# EAGLE board main (EAGLE 7.2.0)
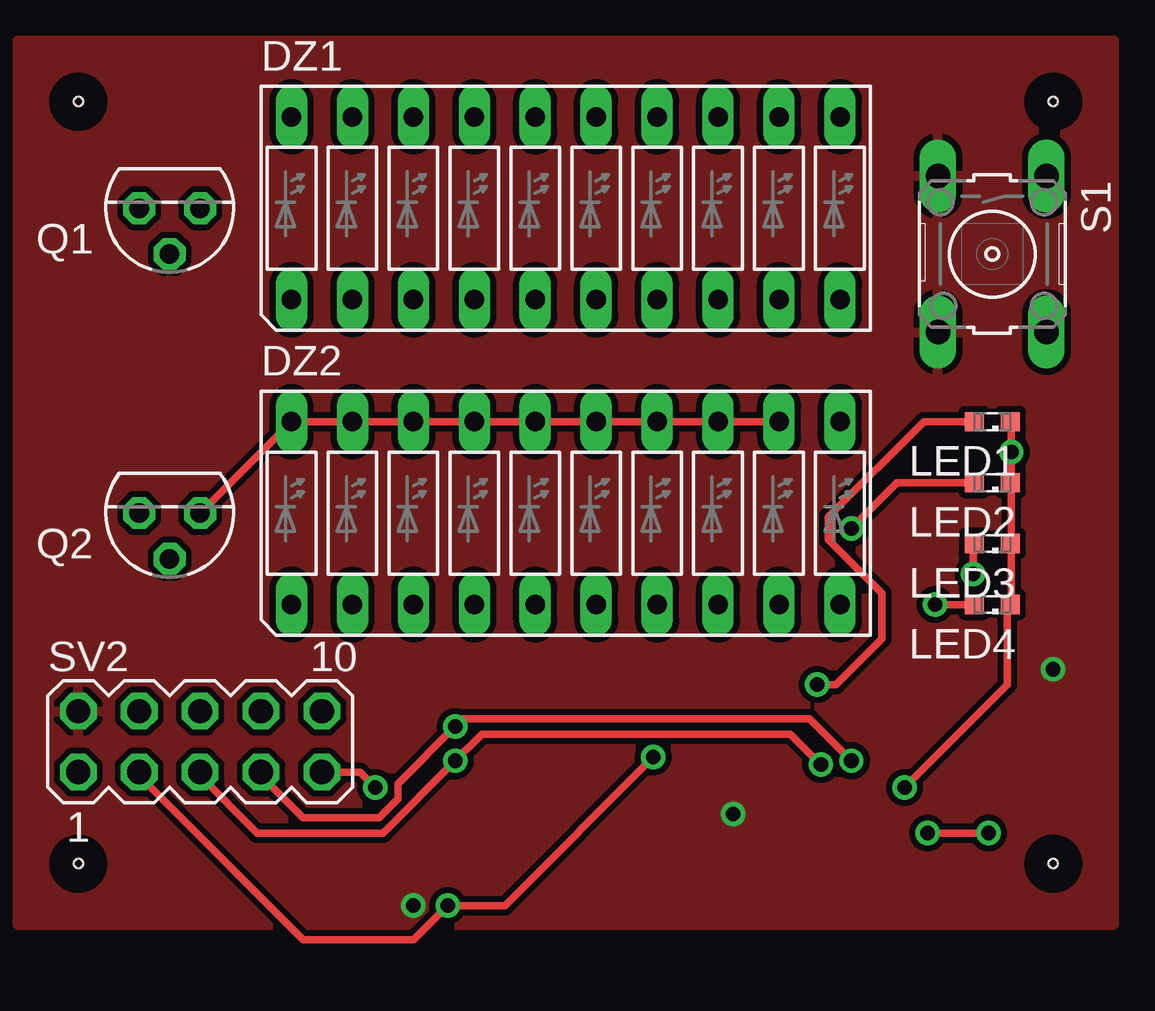
[diagram p0: board, top side]
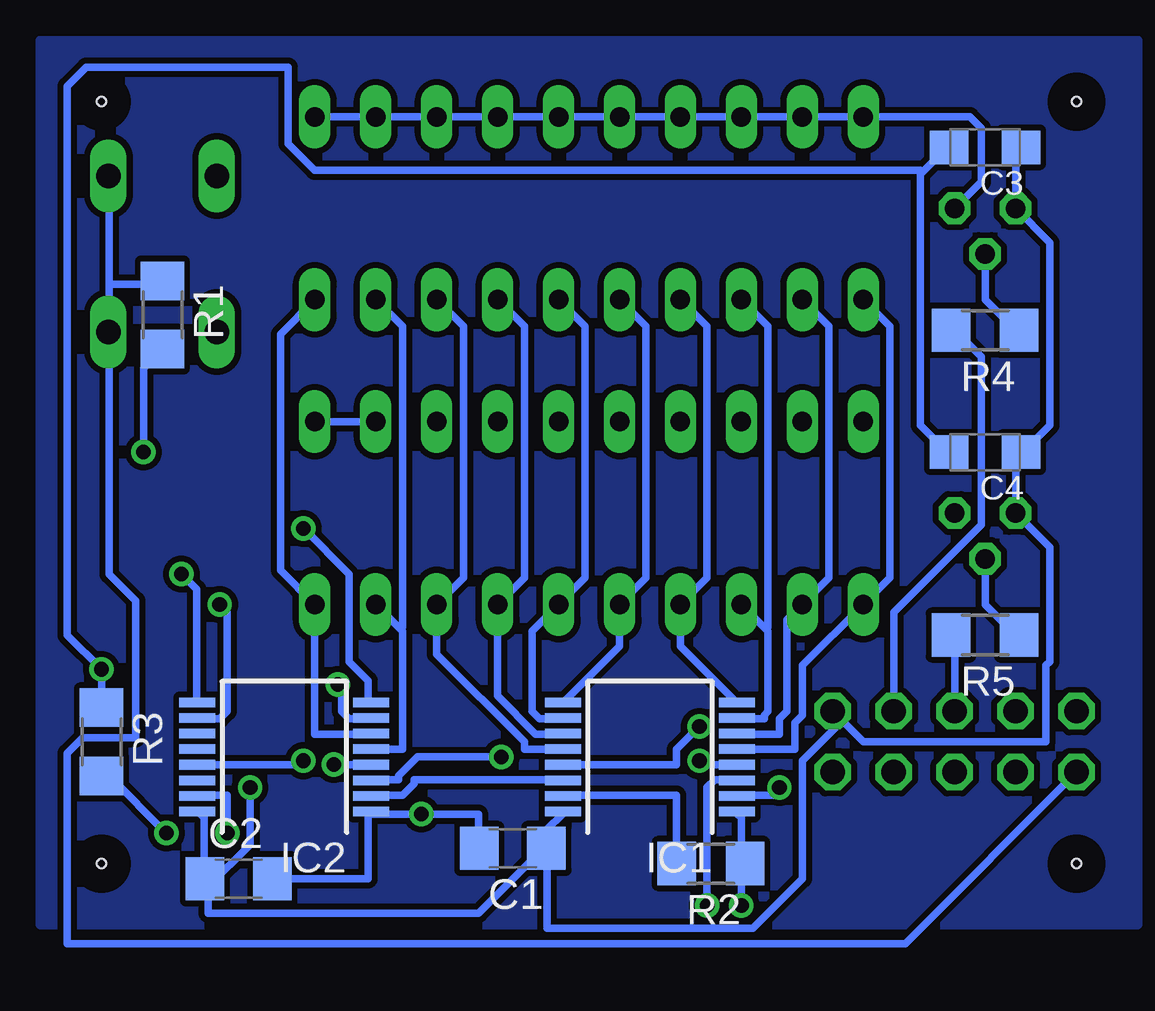
[diagram p1: board, bottom side, seen from below]

No outline drawn. Coordinates in mm, seen from the top.
Copper layers (1*16): Top 0.035mm / dielectric 1.5mm / Bottom 0.035mm
Design rules "default *": minimum track width 12mil, minimum drill 24mil, track to track 10mil, track to pad 10mil, pad to pad 10mil, via to via 10mil, smd to smd 10mil, copper to edge 40mil, drill to drill 8mil, minimum pad ring 10mil, minimum via ring 8mil, stop-mask expansion 4mil, vias tented up to drill 0mil, thermal gap 10mil
Holes 0.38 mm at 2.54,2.54 2.54,34.29 43.18,34.29 43.18,2.54

## Footprints (pad centres in the part's own frame; a part is rotated, then mirrored left to right if it is on the bottom)
C1206 = smd 1.6 x 1.8: 1 -1.4,0; 2 1.4,0
SMC_A = smd 1.6 x 1.4: + -1.5,0; - 1.5,0
LB10 = drill 0.813 long: 1 -11.43,-3.81; 2 -8.89,-3.81; 3 -6.35,-3.81; 4 -3.81,-3.81; 5 -1.27,-3.81; 6 1.27,-3.81; 7 3.81,-3.81; 8 6.35,-3.81; 9 8.89,-3.81; 10 11.43,-3.81; 11 11.43,3.81; 12 8.89,3.81; 13 6.35,3.81; 14 3.81,3.81; 15 1.27,3.81; 16 -1.27,3.81; 17 -3.81,3.81; 18 -6.35,3.81; 19 -8.89,3.81; 20 -11.43,3.81
SSOP16 = smd 0.4 x 1.5: 1 -2.275,-3.625; 2 -1.625,-3.625; 3 -0.975,-3.625; 4 -0.325,-3.625; 5 0.325,-3.625; 6 0.975,-3.625; 7 1.625,-3.625; 8 2.275,-3.625; 9 2.275,3.625; 10 1.625,3.625; 11 0.975,3.625; 12 0.325,3.625; 13 -0.325,3.625; 14 -0.975,3.625; 15 -1.625,3.625; 16 -2.275,3.625
SML0603 = smd 0.8 x 0.8: A 0.75,0; C -0.75,0
TO92 = drill 0.813 octagon: 1 1.27,0; 2 0,1.905; 3 -1.27,0
R1206 = smd 1.6 x 1.803: 1 -1.422,0; 2 1.422,0
B3F-10XX = drill 1.016 long: 1 -3.251,2.261; 2 3.251,2.261; 3 -3.251,-2.261; 4 3.251,-2.261
MA05-2 = drill 1.016 octagon: 1 -5.08,-1.27; 2 -5.08,1.27; 3 -2.54,-1.27; 4 -2.54,1.27; 5 0,-1.27; 6 0,1.27; 7 2.54,-1.27; 8 2.54,1.27; 9 5.08,-1.27; 10 5.08,1.27

## Placement (x,y rotation side)
C1  100n  [C1206]  26.04,3.17 180 bottom
C2  100n  [C1206]  37.47,1.91 0 bottom
C3  1u  [SMC_A]  6.35,32.38 180 bottom
C4  1u  [SMC_A]  6.35,19.68 180 bottom
DZ1  LB10  [LB10]  22.86,29.84 0 top
DZ2  LB10  [LB10]  22.86,17.14 0 top
IC1  SCT2167CSSG  [SSOP16]  20.32,6.99 90 bottom
IC2  SCT2167CSSG  [SSOP16]  35.56,6.99 90 bottom
LED1  [SML0603]  40.64,20.95 180 top
LED2  [SML0603]  40.64,18.41 180 top
LED3  [SML0603]  40.64,15.88 180 top
LED4  [SML0603]  40.64,13.34 180 top
Q1  BC327  [TO92]  6.35,29.84 180 top
Q2  BC327  [TO92]  6.35,17.14 180 top
R1  1k  [R1206]  40.64,25.4 270 bottom
R2  1k  [R1206]  17.78,2.54 180 bottom
R3  1k  [R1206]  43.18,7.62 270 bottom
R4  1k  [R1206]  6.35,24.77 180 bottom
R5  1k  [R1206]  6.35,12.06 180 bottom
S1  [B3F-10XX]  40.64,27.94 270 top
SV2  [MA05-2]  7.62,7.62 0 top

## Library data of the parts
C1-C4 R1-R5 = resistor
DZ1 DZ2 LED1-LED4 = led
IC1 IC2 = starchips
Q1 Q2 = transistor-pnp
S1 = switch-omron; MPN: B3F-1000; OC_FARNELL: 176432; OC_NEWARK: 36M3542
SV2 = con-lstb; OC_FARNELL: unknown; OC_NEWARK: unknown

## Nets
CU-CLK: IC1.3 IC2.3 SV2.3
CU-CTRL: R1.1 S1.1 S1.2 SV2.1
CU-LA: IC1.4 IC2.4 SV2.5
CU-OE: IC1.13 IC2.13 SV2.7
CU-SDI: IC1.2 SV2.9
GND: C1.2 C2.2 C3.- C4.- IC1.1 IC2.1 R2.1 R3.1 S1.3 S1.4 SV2.2
LED1: DZ1.1 DZ2.1 IC1.5
LED2: DZ1.2 DZ2.2 IC1.6
LED3: DZ1.3 DZ2.3 IC1.7
LED4: DZ1.4 DZ2.4 IC1.8
LED5: DZ1.5 DZ2.5 IC1.9
LED6: DZ1.6 DZ2.6 IC1.10
LED7: DZ1.7 DZ2.7 IC1.11
LED8: DZ1.8 DZ2.8 IC1.12
LED9: DZ1.9 DZ2.9 IC2.5
LED10: DZ1.10 DZ2.10 IC2.6
LED11: IC2.7 LED1.A
LED12: IC2.8 LED2.A
LED13: IC2.9 LED3.A
LED14: IC2.10 LED4.A
MUL1: R4.2 SV2.8
MUL2: R5.2 SV2.6
N$2: DZ1.11 DZ1.12 DZ1.13 DZ1.14 DZ1.15 DZ1.16 DZ1.17 DZ1.18 DZ1.19 DZ1.20 Q1.3
N$3: IC1.14 IC2.2
N$4: Q1.2 R4.1
N$5: DZ2.11 DZ2.12 DZ2.13 DZ2.14 DZ2.15 DZ2.16 DZ2.17 DZ2.18 DZ2.19 DZ2.20 Q2.3
N$6: Q2.2 R5.1
N$8: IC1.15 R2.2
N$13: IC2.15 R3.2
VCC: C1.1 C2.1 C3.+ C4.+ IC1.16 IC2.16 LED1.C LED2.C LED3.C LED4.C Q1.1 Q2.1 R1.2 SV2.10

## Tracks (layer width: path | path; a pad name or v marks a point on that pad's centre or on a via)
CU-CLK  (via drill 0.61)
  Top 0.305: SV2.3 5.08,6.19 11.91,-0.64 16.51,-0.64 v17.94,0.79 20.32,0.79 v26.51,6.99
  Bottom 0.305: v17.94,0.79 17.94,5.71 17.62,6.03 16.83,6.03 IC1.3 | v26.51,6.99 30,6.99 30.8,6.19 30.8,6.03 31.91,6.03 IC2.3
CU-CTRL
  Bottom 0.305: 42.86,26.67 40.64,26.67 R1.1 | 42.86,26.67 42.86,24.77 S1.2 42.86,24.61 42.86,14.61 41.75,13.49 41.75,7.78 43.97,7.78 44.61,7.14 44.61,-0.79 9.68,-0.79 SV2.1 | 42.86,26.67 42.86,31.11 S1.1
CU-LA  (via drill 0.61)
  Top 0.305: SV2.5 7.62,6.19 10,3.81 15.24,3.81 v18.26,6.83 19.37,7.94 32.23,7.94 v33.5,6.67
  Bottom 0.305: v18.26,6.83 18.26,6.67 16.83,6.67 IC1.4 | v33.5,6.67 32.07,6.67 IC2.4
CU-OE  (via drill 0.61)
  Top 0.305: SV2.7 10.16,6.19 11.91,4.45 15.08,4.45 15.88,5.24 15.88,5.87 v18.26,8.26 18.57,8.57 33.02,8.57 v34.77,6.83
  Bottom 0.305: v18.26,8.26 19.21,7.3 19.21,6.67 23.81,6.67 IC1.13 | v34.77,6.83 34.77,6.67 39.05,6.67 IC2.13
CU-SDI  (via drill 0.61)
  Top 0.305: v14.92,5.71 14.29,6.35 SV2.9
  Bottom 0.305: v14.92,5.71 14.92,5.4 16.67,5.4 IC1.2
GND  (via drill 0.61)
  Bottom 0.305: C1.2 27.46,3.17 27.46,4.6 v29.84,4.6 31.91,4.6 IC2.1 32.07,4.6 32.07,1.91 C2.2 | 16.51,2.54 16.51,4.45 16.67,4.6 IC1.1 | R3.1 v43.18,10.64 44.61,12.06 44.61,34.92 43.81,35.72 35.4,35.72 35.4,32.54 34.29,31.43 9.05,31.43 8.97,31.35 | 8.97,31.35 7.94,32.38 C3.- | 8.97,31.35 9.05,31.27 9.05,20.8 7.94,19.68 C4.- | v16.51,0.79 16.51,2.54 | 16.51,2.54 R2.1
  pour Top: 0,0 45.72,0 45.72,36.83 0,36.83
LED1
  Bottom 0.305: IC1.5 16.67,7.3 14.29,7.3 14.29,8.41 13.97,8.73 13.97,10.79 DZ2.1 10.32,14.45 10.32,24.92 DZ1.1
LED2
  Bottom 0.305: IC1.6 16.67,7.94 14.92,7.94 14.92,8.57 14.61,8.89 14.61,12.7 DZ2.2 12.86,14.45 12.86,24.92 DZ1.2
LED3
  Bottom 0.305: DZ2.3 15.48,12.3 | 15.48,12.3 15.4,12.22 15.4,8.89 15.56,8.73 15.56,8.57 16.67,8.57 IC1.7 | DZ1.3 15.4,24.92 15.4,12.38 15.48,12.3
LED4
  Bottom 0.305: IC1.8 16.83,9.37 19.05,11.59 DZ2.4 17.94,14.45 17.94,24.92 DZ1.4
LED5
  Bottom 0.305: IC1.9 23.81,9.37 21.59,11.59 DZ2.5 20.48,14.45 20.48,24.92 DZ1.5
LED6
  Bottom 0.305: IC1.10 23.97,8.57 24.92,8.57 25.24,8.89 25.24,12.22 DZ2.6 23.02,14.45 23.02,24.92 DZ1.6
LED7
  Bottom 0.305: IC1.11 23.97,7.94 25.08,7.94 26.67,9.53 DZ2.7 25.56,14.45 25.56,24.92 DZ1.7
LED8
  Bottom 0.305: IC1.12 23.97,7.3 25.56,7.3 25.56,7.62 29.21,11.27 DZ2.8 28.1,14.45 28.1,24.92 DZ1.8
LED9
  Bottom 0.305: DZ2.9 30.72,12.3 | 30.72,12.3 30.64,12.22 30.64,7.3 31.91,7.3 IC2.5 | DZ1.9 30.64,24.92 30.64,12.38 30.72,12.3
LED10
  Bottom 0.305: IC2.6 32.07,7.94 34.29,7.94 DZ2.10 35.72,14.76 35.72,24.61 DZ1.10
LED11  (via drill 0.61)
  Top 0.305: LED1.A 37.78,20.95 33.81,16.99 33.81,16.03 36.04,13.81 36.04,11.91 34.13,10 v33.34,10
  Bottom 0.305: v33.34,10 33.18,9.84 33.18,8.89 32.86,8.57 32.07,8.57 IC2.7
LED12  (via drill 0.61)
  Top 0.305: LED2.A 36.67,18.41 v34.77,16.51
  Bottom 0.305: v34.77,16.51 32.86,14.61 32.86,10.95 32.07,10.16 32.07,9.37 IC2.8
LED13  (via drill 0.61)
  Top 0.305: v39.85,14.61 39.85,15.88 LED3.A
  Bottom 0.305: v39.85,14.61 39.21,13.97 39.21,9.37 IC2.9
LED14  (via drill 0.61)
  Top 0.305: v38.26,13.34 LED4.A
  Bottom 0.305: v38.26,13.34 37.94,13.02 37.94,8.89 38.26,8.57 39.05,8.57 IC2.10
MUL1
  Bottom 0.305: SV2.8 10.16,13.02 6.51,16.67 6.51,23.65 7.62,24.77 R4.2
MUL2
  Bottom 0.305: SV2.6 7.62,12.06 R5.2
N$1
  pour Bottom: 0,0 45.72,0 45.72,36.83 0,36.83
N$2
  Bottom 0.305: Q1.3 6.51,30.96 6.51,33.18 6.99,33.66 DZ1.20 DZ1.19 DZ1.18 DZ1.17 DZ1.16 DZ1.15 DZ1.14 DZ1.13 DZ1.12 DZ1.11
N$3
  Bottom 0.305: IC1.14 23.97,6.03 30.16,6.03 30.16,5.87 30.64,5.4 31.91,5.4 IC2.2
N$4
  Bottom 0.305: Q1.2 6.35,26.04 5.08,24.77 R4.1
N$5
  Top 0.305: Q2.3 DZ2.20 DZ2.19 DZ2.18 DZ2.17 DZ2.16 DZ2.15 DZ2.14 DZ2.13 DZ2.12
  Bottom 0.305: DZ2.11 DZ2.12
N$6
  Bottom 0.305: Q2.2 6.35,13.34 5.08,12.06 R5.1
N$8
  Bottom 0.305: IC1.15 23.81,5.4 19.21,5.4 R2.2
N$13  (via drill 0.61)
  Top 0.305: v40.48,3.81 v37.94,3.81
  Bottom 0.305: v37.94,3.81 37.94,5.4 39.05,5.4 IC2.15 | v40.48,3.81 42.86,6.19 R3.2
VCC  (via drill 0.61)
  Top 0.305: 41.43,15.88 41.43,13.34 LED4.C 41.27,13.34 41.27,10 v36.99,5.71 | 41.43,18.41 v41.43,19.68 41.43,20.95 LED1.C | 41.43,18.41 41.43,15.88 | 41.43,15.88 LED3.C | 41.43,18.41 LED2.C
  Bottom 0.305: C3.+ 4.92,32.38 5.08,32.23 Q1.1 3.65,28.42 3.65,20.8 4.76,19.68 C4.+ 4.92,19.68 5.08,19.53 Q2.1 3.65,15.72 3.65,10.95 3.81,10.79 3.81,7.62 11.43,7.62 SV2.10 12.38,8.41 13.97,6.83 13.97,1.91 16.03,-0.16 24.61,-0.16 24.61,3.17 | v41.43,19.68 41.43,23.18 R1.2 | 24.61,3.17 24.61,3.97 23.97,4.6 IC1.16 | IC2.16 39.05,4.6 38.89,4.45 38.89,1.91 C2.1 | 38.73,1.59 38.73,1.91 C2.1 | 38.73,1.59 38.73,0.48 27.46,0.48 24.77,3.17 C1.1 24.61,3.17 | v36.99,5.71 36.99,3.33 38.73,1.59 | 38.73,1.59 C2.1